# Altium PCB asserv1.PcbDoc
Units mil, origin at the board's own origin, x right, y up, seen from the top; angles counter-clockwise.
Board outline 2380 x 1995 mil, 2 copper layers (Top Layer, Bottom Layer); 68 components, 55 nets, 279 pads, 48 vias.
Unrouted connection lines stored in the file: 1.
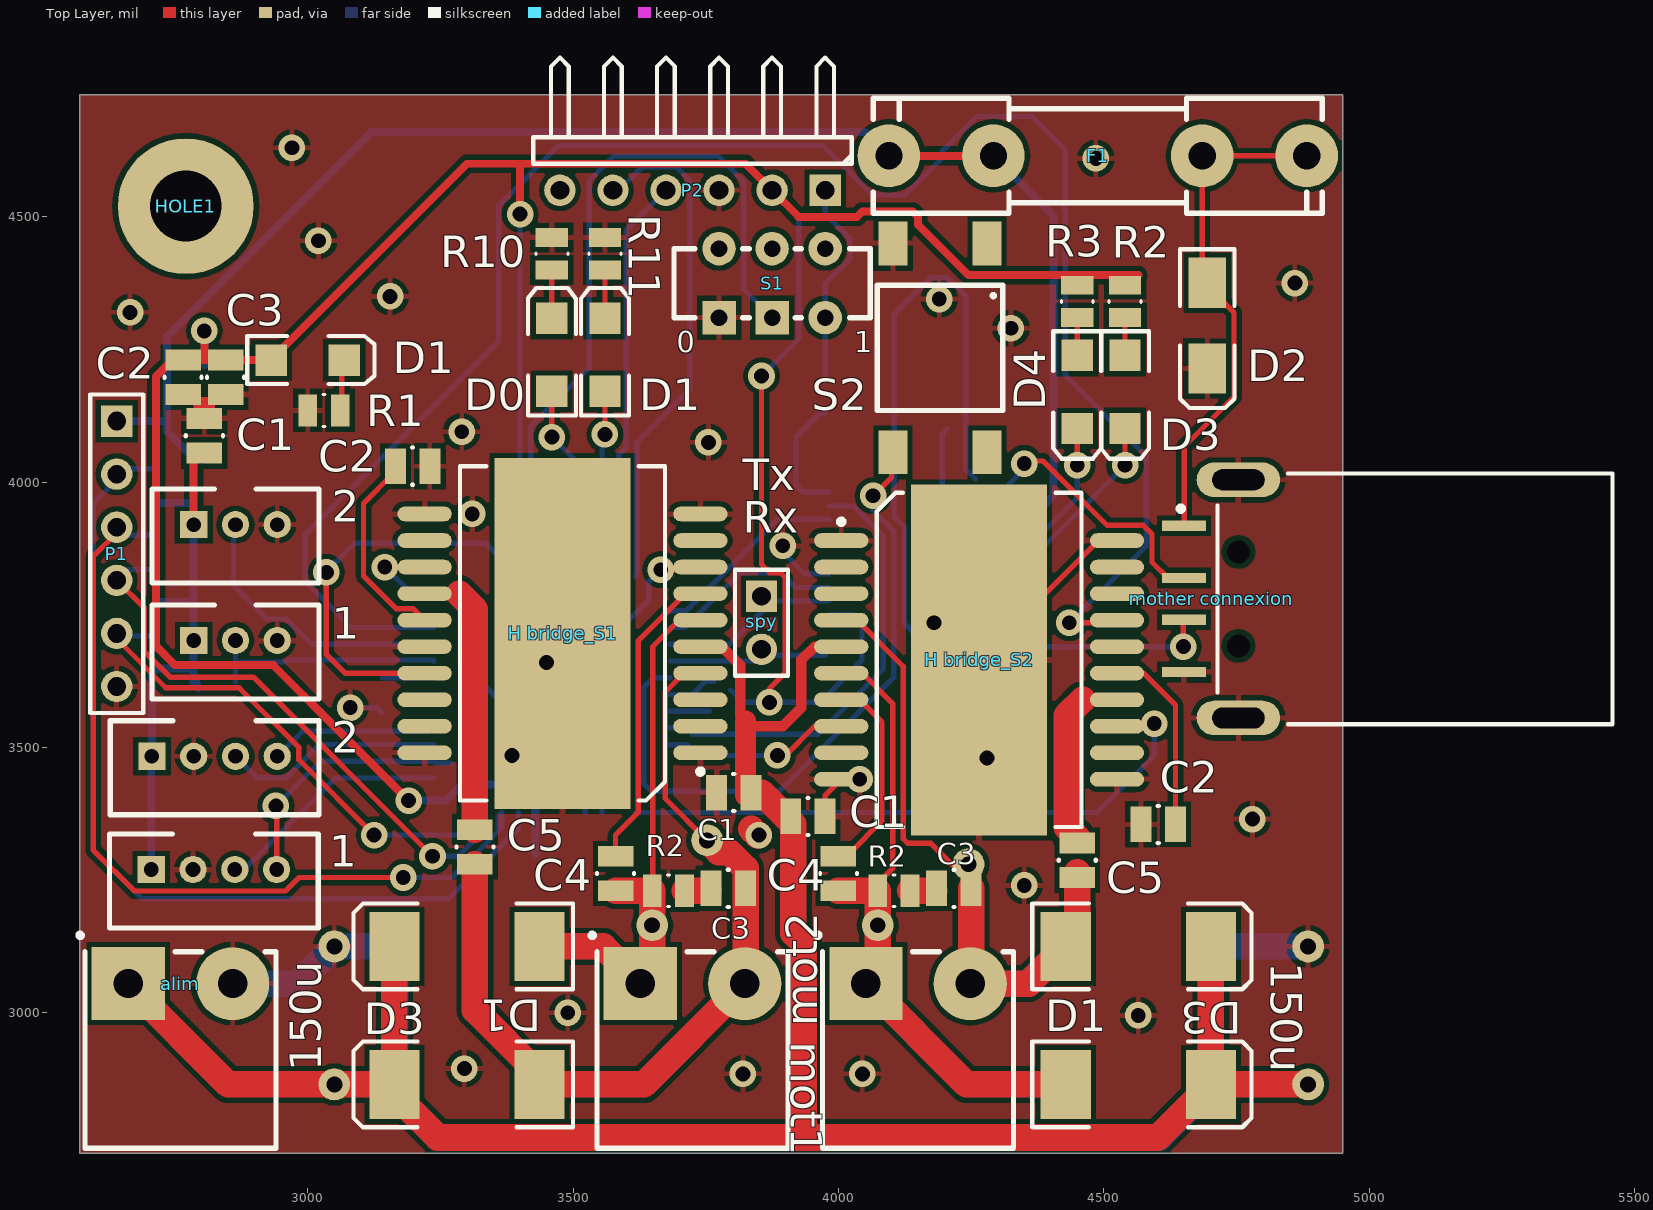
[diagram p0: Top Layer view]
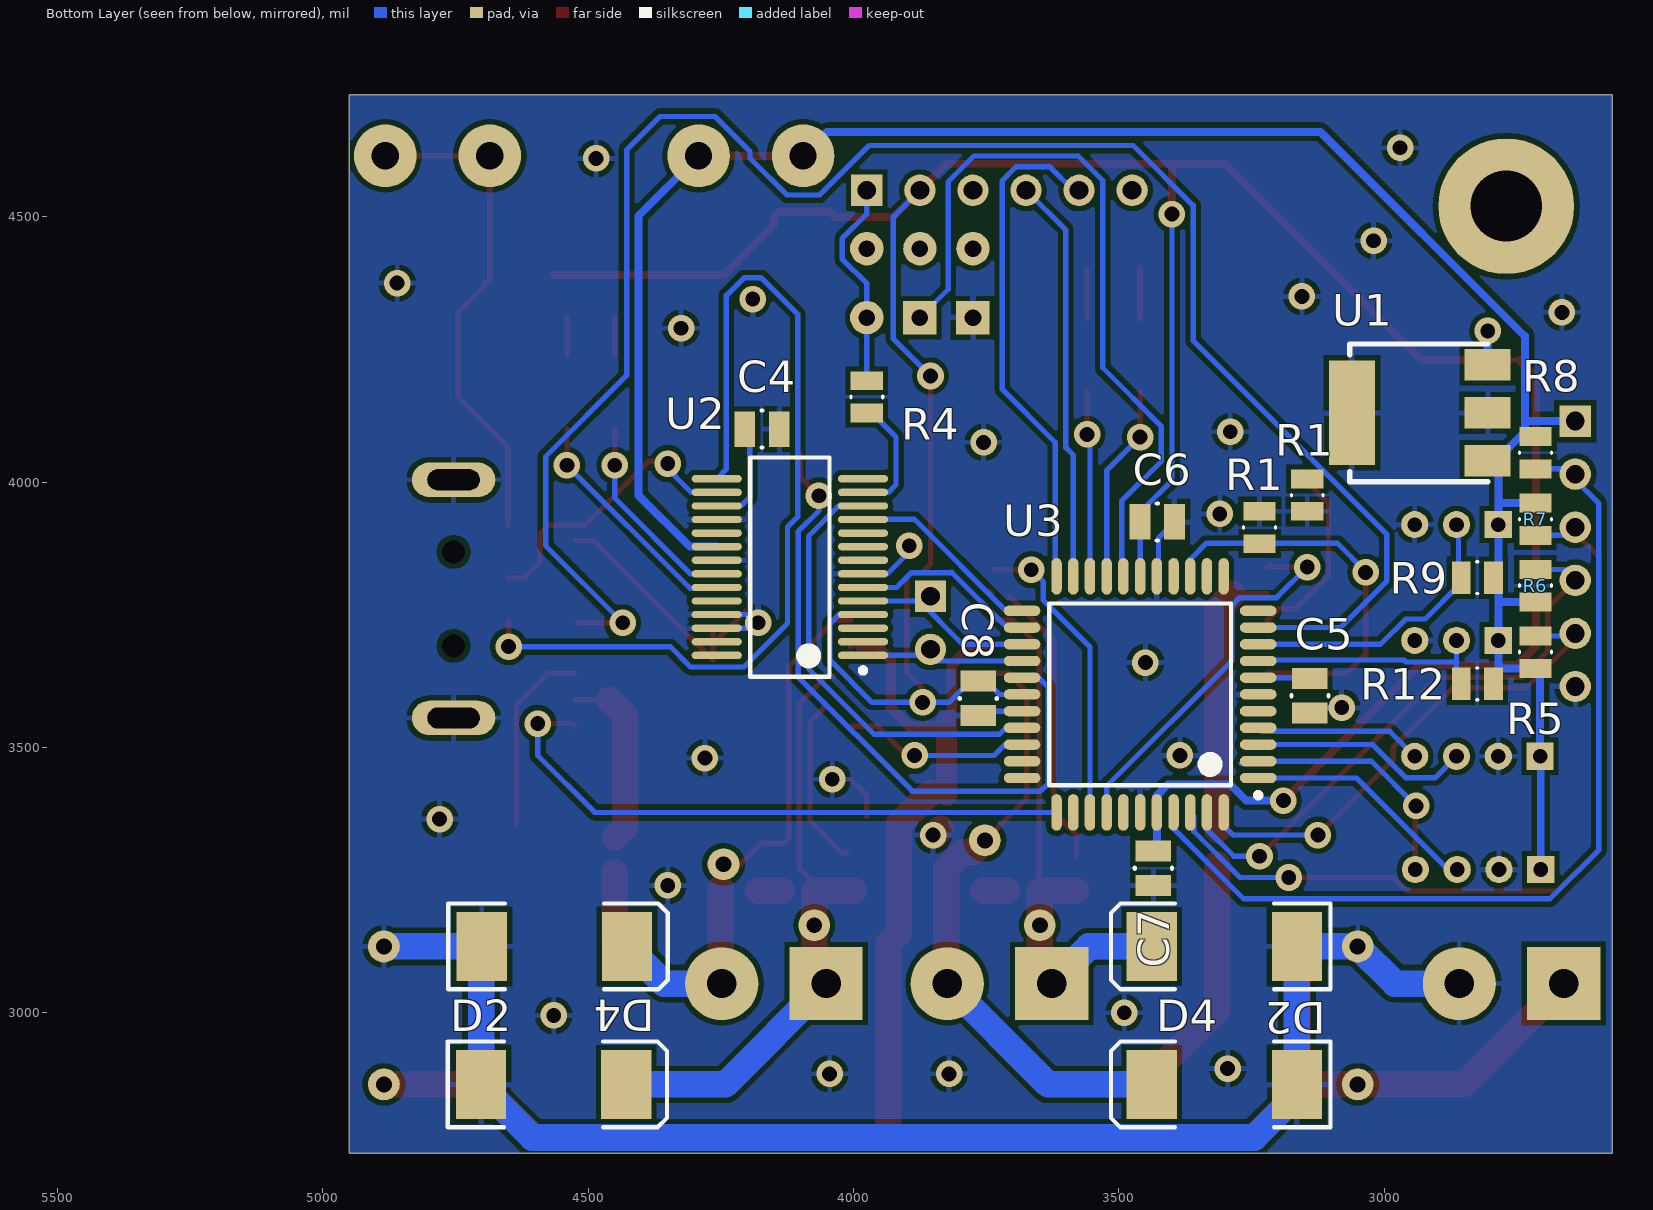
[diagram p1: Bottom Layer view, seen from below]

## Layer stack, top to bottom
Top Layer: signal copper 1.4
Dielectric: dielectric 12.6, FR-4, Dk 4.8
Bottom Layer: signal copper 1.4

## Board outline
2570,2735 2570,4730 4950,4730 4950,2735

## Design rules (kind name [scope] priority, off if disabled: settings)
Clearance [All] p1: gap=10
HoleSize [All] p1: absolutevalues=TRUE maxlimit=140 minlimit=1 maxpercent=80.000 minpercent=20.000
MinimumSolderMaskSliver [All] p1: minsoldermaskwidth=1
PolygonConnect [All] p1: connectstyle=Relief reliefconductorwidth=10 reliefentries=4 polygonreliefangle="90 Angle"
RoutingVias [All] p1: holewidth=28 width=50 viastyle="Through Hole" minholewidth=28 minwidth=50 maxholewidth=28 maxwidth=50
SilkToSilkClearance [All] p1: silktosilkclearance=1
SilkscreenOverComponentPads [All] p1: minsilkscreentomaskgap=1
SolderMaskExpansion [All] p1: expansion=4
Width [All] p1: maxlimit=100 minlimit=10 preferedwidth=10 minimp=50.000000 maximp=50.000000 favimp=50.000000
24 further rules are at their usual default settings.

## Classes and differential pairs
component class S2: C1 C2 C3 C4 C5 D1 D2 D3 D4 "H bridge_S2" mot2 R1 R2
channel class motors1-bridge: S1 S2
net class PWM[1..2]: PWM1 PWM2
net class DIRB[1..2]: DIRB1 DIRB2
net class DIRA[1..2]: DIRA1 DIRA2
component class S1: C1 C2 C3 C4 C5 D1 "H bridge_S1" mot1 R1 R2
component class asserv1: 1 2 alim C1 C2 C3 C4 C5 C6 C7 C8 D0 D1 D2 D3 D4 F1 HOLE1 "mother connexion" P1 P2 R1 R2 R3 R4 R5 R6 R7 R8 R9 R10 R11 R12 S1 spy U1 U2 U3

## Components (designator, comment, footprint, x,y, rotation, side; value= is the part's Value field where it differs from the comment)
1 "JST" B3B-PH-K-S 2785,3701.67 r0 top (schematic designator servo1)
1 "JST" B4B-PH-K-S 2705,3270 r0 top (schematic designator Encodeur1)
2 "JST" B3B-PH-K-S 2785,3920 r0 top (schematic designator servo2)
2 "JST" B4B-PH-K-S 2706.26,3483.33 r0 top (schematic designator Encodeur2)
alim "Bornier" "Bornier male coude 2 voies" 2760,3055 r0 top (schematic designator "alim motors")
C1 "" C0805C 2805,4055 r90 top
C1 "CAP" C0805C 3975,3370 r180 top
C1 "CAP" C0805C 3770,3415 r0 top
C2 "" C0805C 2765,4230 r270 top
C2 "CAP" C0805C 4570,3355 r0 top
C2 "CAP" C0805C 3230,4030 r180 top
C3 "" C0805C 2845,4230 r270 top
C3 "CAP" C0805C 4185,3234.43 r0 top
C3 "CAP" C0805C 3760,3234.43 r0 top
C4 "" C0805C 4140,4100 r0 bottom
C4 "CAP" C0805C 4000,3295 r270 top
C4 "CAP" C0805C 3580,3295 r270 top
C5 "" C0805C 3140,3630 r270 bottom
C5 "CAP" C0805C 4450,3320 r270 top
C5 "CAP" C0805C 3315,3345 r270 top
C6 "" C0805C 3460,3925 r180 bottom
C7 "" C0805C 3435,3305 r270 bottom
C8 "" C0805C 3765,3625 r270 bottom
D0 "LED" LED1206R 3460,4240 r90 top (schematic designator "led debug 0")
D1 "LED" LED1206R 3560,4240 r90 top (schematic designator "led debug 1")
D1 "LED2" LED1206G 3000,4230 r0 top
D1 "Diode" DSO-C2/X3.3 4565,2865 r0 top
D1 "Diode" DSO-C2/X3.3 3300,3125 r180 top
D2 "Diode" DSO-C2/X3.3 3301.22,3125 r0 bottom
D2 "Diode" DSO-C2/X3.3 4565,2865 r180 bottom
D2 "ZENER/5.6V" DSO-C2/X1.8 4695,4295 r270 top
D3 "Diode" DSO-C2/X3.3 3300,2865 r180 top
D3 "Diode" DSO-C2/X3.3 4565,3125 r0 top
D3 "LED2" LED1206Y 4540,4170 r270 top
D4 "Diode" DSO-C2/X3.3 3301.22,2865 r0 bottom
D4 "Diode" DSO-C2/X3.3 4563.78,3125 r180 bottom
D4 "LED2" LED1206Y 4450,4170 r270 top
F1 "200mA" "Fuse Holder 5x20mm" 4095,4615 r0 top
"H bridge_S1" "L6201P" PowerSO20_M 3480,3715 r180 top (schematic designator "H bridge")
"H bridge_S2" "L6201P" PowerSO20_M 4265,3665 r0 top (schematic designator "H bridge")
HOLE1 "Hole" SCREW 2770,4520 r90 top
mot1 "Bornier" "Bornier male coude 2 voies" 3725,3055 r0 top (schematic designator motors)
mot2 "Bornier" "Bornier male coude 2 voies" 4150,3055 r0 top (schematic designator motors)
"mother connexion" "USB male" "USB SM2.5 Male" 4860,3780 r0 top
P1 "Header 6" HDR1X6 2640,4115 r270 top
P2 "PICkit" HDR1X6H 3975,4550 r180 top
R1 "" C0805R 3000,4135 r0 top
R1 "RES" C0805R 3145,3945 r90 bottom
R1 "RES" C0805R 3235,3945 r270 bottom
R2 "" C0805R 4540,4310 r90 top
R2 "RES" C0805R 4135,3230 r180 top
R2 "RES" C0805R 3710,3230 r180 top
R3 "" C0805R 4450,4310 r90 top
R4 "" C0805R 3975,4130 r90 bottom
R5 "" C0805R 2715,3710 r270 bottom
R6 "" C0805R 2715,3835.34 r270 bottom
R7 "" C0805R 2715,3899.66 r90 bottom
R8 "" C0805R 2715,4025 r90 bottom
R9 "" C0805R 2855,3820 r180 bottom
R10 "" C0805R 3460,4400 r90 top
R11 "" C0805R 3560,4400 r90 top
R12 "" C0805R 2855,3620 r180 bottom
S1 "SW-DPDT/Reset" MCLSS22 3875,4310 r0 top
S2 "SPST-NO/RC2" SPST-NO 4280,4450 r180 top
spy "Header 2" HDR1X2 3855,3785 r270 top
U1 "LM2937IMP-3.3" SOT223 2805,4040 r90 bottom
U2 "FT232RL" SSOP-28_M 4120,3840 r0 bottom
U3 "DSPIC33FJ64MC804-I/PT" TQFP-PT44_N 3460,3600 r0 bottom

## Footprints (in the part's own frame and the unit in brackets; to place one, negate y for a bottom-side part, rotate by r counter-clockwise, add the part's x,y. Pads: shape width x height; smd on the part's side, far side on the other; paste and mask are expansions set on the pad)
B3B-PH-K-S [mm] "JST Header 3 pins Straight"
  rect 1.3x1.3 hole 0.7: 1(0,0)
  round 1.3 hole 0.7: 2(2,0) 3(4,0)
  silkscreen extent -2,-2.8 6,1.7, body extent -1.95,-2.8 5.95,1.7, height 6
B4B-PH-K-S [mm] "JST Header 4 pins Straight"
  rect 1.3x1.3 hole 0.7: 1(0,0)
  round 1.3 hole 0.7: 2(2,0) 3(4,0) 4(6,0)
  silkscreen extent -2,-2.8 8,1.7, body extent -1.95,-2.8 7.95,1.7, height 6
"Bornier male coude 2 voies" [mm] "Bornier male coude 2 voies 12A. Pas 5mm (model : CTB9350/2A) -- 3D FAUSSE"
  rect 3.5x3.5 hole 1.4: 1(-2.5,0)
  round 3.5 hole 1.4: 2(2.5,0)
  silkscreen extent -4.9,-7.87 4.57,2.41, body extent -4.2,-7.93 4.2,1.27, height 7.25
C0805C [mm]
  rect 1x1.7 smd: 1(0,0) 2(1.65,0)
  silkscreen extent 0.8,-0.89 0.85,0.89, body extent -0.21,-0.61 1.79,0.64, height 0.78
C0805R [mm]
  rect 0.9x1.55 smd: 1(0,0) 2(1.55,0)
  silkscreen extent 0.73,-0.76 0.81,0.76, body extent -0.24,-0.62 1.76,0.63, height 0.78
DSO-C2/X1.8 [mm] "Diode; DO-214-AC/SMA; 2 C-Bend Leads; Body 5 x 2.7 mm, inc. leads (LxW)"
  rect 2.4x1.8 smd: A(2.05,0) K(-2.05,0)
  silkscreen extent -3.65,-1.3 3.95,1.3, body extent -2.74,-1.4 2.74,1.4, height 2.28
DSO-C2/X3.3 [mm] "DO-214-AB/SMC; 2 C-Bend Leads; Body 7.9 x 5.9 mm, inc. leads (LxW)"
  rect 2.4x3.3 smd: A(-3.475,0) K(3.475,0)
  silkscreen extent -5.07,-2.05 5.43,2.05, body extent -4.06,-3.15 4.06,3.15, height 2.67
"Fuse Holder 5x20mm" [mm] "Schurter Fuse Holder 0751.0110"
  round 3 hole 1.3: 1(0,0) 1(5,0) 2(15,0) 2(20,0)
  silkscreen extent -0.75,-2.75 20.75,2.75, body extent -0.51,-3.1 20.58,3.1, height 9.86
HDR1X2 [mm] "Connector; Header; 2 Position"
  rect 1.5x1.5 hole 0.9: 1(0,0)
  round 1.5 hole 0.9: 2(2.54,0)
  silkscreen extent -1.27,-1.27 3.81,1.27, body extent -1.17,-1.25 3.91,1.25, height 8.2
HDR1X6 [mm] "Connector; Header; 6 Position"
  rect 1.5x1.5 hole 0.9: 1(0,0)
  round 1.5 hole 0.9: 2(2.54,0) 3(5.08,0) 4(7.62,0) 5(10.16,0) 6(12.7,0)
  silkscreen extent -1.27,-1.27 13.97,1.27
HDR1X6H [mm] "Connector; Header; 6 Position; Right Angle"
  rect 1.5x1.5 hole 0.9: 1(0,0)
  round 1.5 hole 0.9: 2(2.54,0) 3(5.08,0) 4(7.62,0) 5(10.16,0) 6(12.7,0)
  silkscreen extent -1.27,-6.35 13.97,-1.27, body extent -1.17,-5.85 13.87,1.25, height 5.42
LED1206G [mm] "SMT LED; 2 Flat Leads; 3.2X1.6X1.1"
  rect 1.5x1.5 smd: 1(-1.75,0) 2(1.75,0)
  silkscreen extent -2.9,-1.15 3.2,1.15, body extent -1.6,-0.8 1.6,0.8, height 1.11
LED1206R [mm] "SMT LED; 2 Flat Leads; 3.2X1.6X1.1"
  rect 1.5x1.5 smd: 1(-1.75,0) 2(1.75,0)
  silkscreen extent -2.9,-1.15 3.2,1.15, body extent -1.6,-0.8 1.6,0.8, height 1.11
LED1206Y [mm] "SMT LED; 2 Flat Leads; 3.2X1.6X1.1"
  rect 1.5x1.5 smd: 1(-1.75,0) 2(1.75,0)
  silkscreen extent -2.9,-1.15 3.2,1.15, body extent -1.6,-0.8 1.6,0.8, height 1.11
MCLSS22 [mm] "Slide Switch DPDT"
  rect 1.6x1.6 hole 0.8: 1(0,0) 2(-2.54,0)
  round 1.6 hole 0.8: 3(2.54,0) 4(0,3.3) 5(-2.54,3.3) 6(2.54,3.3)
  silkscreen extent -4.7,0 4.7,3.3, body extent -4.7,-2 4.7,3.3, height 3.5
PowerSO20_M [mm] "SOP, 20-Leads, Body 15.9x11mm, Pitch 1.27mm, IPC Low Density"
  oval 2.6x0.7 smd: 1(-6.6,5.715) 2(-6.6,4.445) 3(-6.6,3.175) 4(-6.6,1.905) 5(-6.6,0.635) 6(-6.6,-0.635) 7(-6.6,-1.905) 8(-6.6,-3.175) 9(-6.6,-4.445) 10(-6.6,-5.715) 11(6.6,-5.715) 12(6.6,-4.445) 13(6.6,-3.175) 14(6.6,-1.905) 15(6.6,-0.635) 16(6.6,0.635) 17(6.6,1.905) 18(6.6,3.175) 19(6.6,4.445) 20(6.6,5.715)
  rect 6.5x16.8 smd: 21(0,0)
  silkscreen extent -6.73,-8 4.9,8, body extent -7.2,-8 7.2,8, height 3.6
SCREW [mm] "Mounting Hole M3"
  round 6.5 hole 3.4: 1(0,0)
  body extent -2.89,-2.52 2.89,2.52, height 10
SOT223 [mm]
  rect 1.5x2.2 smd: 1(0,0) 2(2.3,0) 3(4.6,0)
  rect 5x2.2 smd: ""(2.3,6.5)
  silkscreen extent -1,0 5.6,6.6, body extent -0.95,-0.2 5.55,6.8, height 1.64
SPST-NO [mm] "Tactile Switch SPST-NO 6x6mm"
  rect 1.4x2.1 smd: 1(0,0) 2(4.5,0) 3(4.5,10) 4(0,10)
  silkscreen extent -0.75,2 5.25,8, body extent -0.75,0.93 5.25,9.08, height 5
SSOP-28_M [mm] "SOP, 28-Leads, Body 10.2x5.3mm, Pitch 0.65mm, IPC Low Density"
  oval 2.4x0.35 smd: 1(-3.5,4.225) 2(-3.5,3.575) 3(-3.5,2.925) 4(-3.5,2.275) 5(-3.5,1.625) 6(-3.5,0.975) 7(-3.5,0.325) 8(-3.5,-0.325) 9(-3.5,-0.975) 10(-3.5,-1.625) 11(-3.5,-2.275) 12(-3.5,-2.925) 13(-3.5,-3.575) 14(-3.5,-4.225) 15(3.5,-4.225) 16(3.5,-3.575) 17(3.5,-2.925) 18(3.5,-2.275) 19(3.5,-1.625) 20(3.5,-0.975) 21(3.5,-0.325) 22(3.5,0.325) 23(3.5,0.975) 24(3.5,1.625) 25(3.5,2.275) 26(3.5,2.925) 27(3.5,3.575) 28(3.5,4.225)
  silkscreen extent -3.62,-5.25 1.9,5.25, body extent -3.91,-5.1 3.91,5.1, height 1.98
TQFP-PT44_N [mm] "Thin QFP, 44-Leads, Body 10x10mm, Pitch 0.8mm, IPC Medium Density"
  oval 1.75x0.5 smd: 1(-5.65,4) 2(-5.65,3.2) 3(-5.65,2.4) 4(-5.65,1.6) 5(-5.65,0.8) 6(-5.65,0) 7(-5.65,-0.8) 8(-5.65,-1.6) 9(-5.65,-2.4) 10(-5.65,-3.2) 11(-5.65,-4) 23(5.65,-4) 24(5.65,-3.2) 25(5.65,-2.4) 26(5.65,-1.6) 27(5.65,-0.8) 28(5.65,0) 29(5.65,0.8) 30(5.65,1.6) 31(5.65,2.4) 32(5.65,3.2) 33(5.65,4)
  oval 0.5x1.75 smd: 12(-4,-5.65) 13(-3.2,-5.65) 14(-2.4,-5.65) 15(-1.6,-5.65) 16(-0.8,-5.65) 17(0,-5.65) 18(0.8,-5.65) 19(1.6,-5.65) 20(2.4,-5.65) 21(3.2,-5.65) 22(4,-5.65) 34(4,5.65) 35(3.2,5.65) 36(2.4,5.65) 37(1.6,5.65) 38(0.8,5.65) 39(0,5.65) 40(-0.8,5.65) 41(-1.6,5.65) 42(-2.4,5.65) 43(-3.2,5.65) 44(-4,5.65)
  silkscreen extent -5.77,-4.35 4.35,4.95, body extent -6,-6 6,6, height 1.05
"USB SM2.5 Male" [mm] "USB/SM2.5-4H4; Male USB Connector; USB1.1, Type A, SM; 4 Position; Right Angle"
  rect 2.1x0.5 smd: 1(-5.3,3.5) 2(-5.3,1) 3(-5.3,-1) 4(-5.3,-3.5)
  oval 4x1.65 hole 1 slot 2.5 at 0 deg: 5(-2.7,-5.7) 6(-2.7,5.7)
  round 0.8 hole 1.1 unplated: MH1(-2.7,-2.25) MH2(-2.7,2.25)
  silkscreen extent -5.58,-6 15.2,6, body extent -3.5,-6 14.83,6, height 4.5

## Part data
1 2: library part "Header 3", "Header, 3-Pin"
1 2: library part "Header 4", "Header, 4-Pin"
alim mot1 mot2: library part "Header 2", "Header, 2-Pin"
C1 C2 C3 C4 C5 C6 C7 C8: library part "Cap Semi", "Capacitor (Semiconductor SIM Model)"
C1 C1 C2 C2 C3 C3 C4 C4 C5 C5: "Capacitor"
D0 D1: library part LED2, "Typical RED, GREEN, YELLOW, AMBER GaAs LED"
D1 D3 D4: "Typical RED, GREEN, YELLOW, AMBER GaAs LED"
D1 D1 D2 D2 D3 D3 D4 D4: "Default Diode"
D2: library part ZENER, "ZENER"
F1: library part FUSE1
"H bridge_S1" "H bridge_S2": "DMOS Full Bridge Driver"
HOLE1: "Mounting Hole for screws"
"mother connexion": library part "USB Con", "USB Connector"
P1: "Header, 6-Pin"
P2: library part "Header ICSP", "Header, 6-Pin, Right Angle"
R1 R2 R3 R4 R5 R6 R7 R8 R9 R10 R11 R12: library part Res3, "Resistor"
R1 R1 R2 R2: "Resistor"
S1: library part SW-DPDT, "Double-Pole, Double-Throw Switch, ref MCLSS22"
S2: library part SPST-NO, "Tactile Switch 7.3mm, SMD"
spy: "Header, 2-Pin"
U1: "500 mA Low Dropout Regulator"
U2: "USB UART Asynchronous Serial Data Transfer Chip, SSOP-28, Tube"
U3: "High-Performance 16-bit Digital Signal Controller, 64 KB Flash, 16 KB RAM, 44-Pin TQFP, Industrial Temperature"

## Free pads (board coordinates)
  round 60 hole 30: 0(3050,3125) 1(3050,2865) 2(4885,2865) 4(4885,3125) 5(3648.98,3165) 7(4073.98,3165) 11(3752.57,3325) 12(4245,3280)

## Via types
v1: diameter 50, hole 28, Top Layer to Bottom Layer, 48 vias

## Nets (pads, with @x,y where several pads share a name; then routed paths per layer and width w, separated by ;. In a path a pad name is that pad's centre, name@x,y a point inside that pad or via, vN(x,y) a via of type N, cw(c..) or ccw(c..) an arc to the next point about the centre after c; other vN are vias at no path point)
+3V3: C2.1@2765,4230 C3.1@2845,4230 C6.1 C7.1 C8.1 D1.1@2931.1,4230 P2.2 R2.2@4540,4371.02 R3.2 U1.3 U2.4 U3.17 U3.28 U3.40 | length 6108.1
  Top Layer w10: C2.1@2745,4230 C2.1@2765,4230 ; v1@3855,3585 v1(3870,3585) 3870,3610.94 3899.53,3640.47 3899.53,3820.74 3890.74,3829.53 3870.74,3829.53 3855,3845.27 v1(3855,4200) v1@3855,4205.79 ; P2.2 P2.2@3880,4550
  Top Layer w15: C2.1@2745,4230 2714.04,4199.04 2714.04,3690.96 2750,3655 2935,3655 2992.5,3597.5 2992.5,3597.4 3017.4,3572.5 3017.5,3572.5 v1(3190,3400) ; C2.1@2765,4230 2805,4230 ; v1(2805,4285) 2805,4230 ; v1(3400,4505) 3400,4600 ; 4565,4390 4245,4390 4150,4485 4150,4500 4140,4510 4045,4510 4035,4500 3925,4500 P2.2 3825,4600 3400,4600 ; 2805,4230 2845,4230 2930,4230 3300,4600 3400,4600
  Bottom Layer w10: v1(3400,4505) 3400,4003.19 C6.1@3454.09,3949.09 ; U3.40 U3.40@3430,3379.05 ; U3.17 C6.1 C6.1@3460,3934.4 ; U3.28 3725,3600 3750,3625 C8.1 ; C8.1@3797.03,3607.97 3820,3585 v1(3870,3585) 3964.85,3585 4044.45,3664.59 4044.45,3733.91 4028.36,3750 3982.64,3750 U2.4 ; v1@3860.79,4205.79 3925,4270 3925,4500 P2.2
  Bottom Layer w15: U1.3 v1(2805,4285) ; v1(3190,3400) 3260,3400 3290,3430 3407.84,3430 3430,3407.84 U3.40@3430,3379.05 ; U3.40 3428.5,3301.5 C7.1@3430,3300 ; v1(3855,4200) 3855,4205.79 v1@3860.79,4205.79
+5V0: 1.1 2.1 C1.1@2805,4055 F1.1 P1.1 R5.2 R6.2 R7.2 R8.2 R9.2 R12.2 U1.1 U2.20 | length 4169.3
  Top Layer w15: 2.1@2785,3920 C1.1@2785,4055 ; F1.1@4095,4615 F1.1@4291.85,4615
  Bottom Layer w10: 2.1@2705,3482.07 2.1@2706.26,3483.33 ; R12.2@2783.98,3648.98 R12.2 R12.2@2793.98,3608.98 ; U1.1@2790,4040 U1.1
  Bottom Layer w15: P1.1 2735,4115 ; 1.1@2705,3265 2.1@2705,3482.07 ; 2.1@2706.26,3483.33 2706.26,3640.24 R5.2 R12.2@2783.98,3648.98 ; R6.2 2784.32,3774.32 ; R7.2 2784.32,3960.68 ; R12.2@2785,3620 2785,3701.67 2785,3920 U1.1@2785,4040 ; U1.1@2790,4040 2735,4095 2735,4115 ; F1.1@4095,4615 4050,4660 3119.9,4660 2735,4275.1 2735,4115 ; U2.20 4308.39,3878.39 4405,3975 4405,4501.85 F1.1@4291.85,4615
+30V: "H bridge_S1.5" "H bridge_S2.5" alim.1 C1.2@3834.96,3415 C1.2@3910.04,3370 D1.K D3.K pad.1 pad.2 | length 4210.2
  Top Layer w10: 3744.37,3694.53 3739.84,3690 3780,3690 ; C1.2@3829.96,3415 C1.2@3829.96,3430.04 ; 4005.12,3689.96 4005.16,3690
  Top Layer w15: 3955,3690 3990,3690
  Top Layer w20: D3.K@3163.19,2846.81 D3.K@3163.19,2865 ; 3780,3690 3815,3655 3815,3560 ; 3835,3540 3895,3540 3930,3575 3930,3665 3955,3690
  Top Layer w40: C1.2@3825,3410 3825,3550
  Top Layer w50: alim.1@2660.79,3054.21 2850,2865 3163.19,2865 D1.K@3163.19,3125 ; D3.K@3163.19,2846.81 3245,2765 3935,2765 3935,3130 3915,3150 3915,3355 3855,3415 ; 3940,2765 4601.81,2765 D1.K@4701.81,2865 ; D3.K@4701.81,3125 D1.K@4701.81,2865 ; pad.2 D1.K@4701.81,2865
A1: 1.3@2862.48,3270 U3.1 | length 448.6
  Bottom Layer w10: 1.3@2862.48,3265 2875,3265 3052.52,3442.52 U3.1
A2: 2.3@2863.74,3483.33 U3.3 | length 416.6
  Bottom Layer w10: 2.3@2863.74,3483.33 2904.33,3442.74 2959.29,3442.74 3022.06,3505.51 U3.3
B1: 1.4 U3.2 | length 491.3
  Top Layer w10: 1.4@2941.22,3265 v1@2941.22,3390
  Bottom Layer w10: v1(2940,3390) 3024.02,3474.02 U3.2 3241.57,3470 U3.2@3269.82,3470
B2: 2.4 U3.4 | length 317.3
  Bottom Layer w10: 2.4 2989.5,3530.35 3230.91,3530.35 U3.4
CLK12: U2.12 U3.30 | length 834.2
  Bottom Layer w10: U3.30 3712.99,3537.01 3725,3525 3961.42,3525 4084.45,3648.03 4084.45,3898.63 4028.08,3955 3982.36,3955 U2.12
D+: "mother connexion.3" U2.15 | length 1744.9
  Top Layer w10: v1(4650,3690) 4650,3739.29
  Bottom Layer w10: U2.15 4239.65,4024.49 4239.65,4351.92 4206.57,4385 4173.43,4385 4105.31,4316.88 4105.31,3934.34 4124.45,3915.2 4124.45,3733.98 4206.66,3651.77 4307.22,3651.77 4345.44,3690 v1(4650,3690)
D-: "mother connexion.2" U2.16 | length 560.5
  Top Layer w10: v1(4350,4035) 4355,4040 4385.15,4040 4506.37,3918.78 4574.16,3918.78 4591.02,3901.92 4591.02,3848.98 4620.63,3819.37 4651.34,3819.37
  Bottom Layer w10: U2.16 4305.75,3980.75 4360,4035 v1(4350,4035)
"DATA SERVO1": 1.2@2863.74,3701.67 R12.1 U3.8 | length 452.9
  Bottom Layer w10: R12.1@2863.74,3623.74 1.2@2863.74,3701.67 ; 2864.82,3661.08 2959.29,3661.08 2962.9,3664.69 3235.87,3664.69 U3.8
"DATA SERVO2": 2.2@2863.74,3920 R9.1 U3.9 | length 534.6
  Bottom Layer w10: 2.2@2860,3916.26 2860,3820 2860,3805 2922.74,3742.26 2959.29,3742.26 3007.06,3694.49 U3.9
DIRA1: "H bridge_S1.8" U3.36 | length 573.1
  Top Layer w10: v1(3665,3835) 3734.84,3835
  Bottom Layer w10: U3.36 3554.49,3689.27 3642.32,3777.1 3642.32,3812.32 v1(3665,3835)
DIRA2: "H bridge_S2.8" U3.31 | length 354
  Top Layer w10: v1(3885,3485) 3900,3485 3955,3540 4005.16,3540
  Bottom Layer w10: U3.31 3682.6,3505.35 3714.65,3505.35 3735,3485 v1(3885,3485)
DIRB1: "H bridge_S1.13" U3.37 | length 742.1
  Top Layer w10: v1(3145,3840) 3220.16,3840 3215.16,3845
  Bottom Layer w10: v1(3145,3840) 3202.68,3782.32 3272.46,3782.32 3287.01,3767.77 3287.01,3662.99 3522.99,3427.01 U3.37
DIRB2: "H bridge_S2.13" U3.34 | length 1154.3
  Top Layer w10: 4524.84,3540 4529.84,3545 v1(4595,3545)
  Bottom Layer w10: U3.34 4487.56,3377.56 4595,3485 v1(4595,3545)
FLUSH: U2.6 U3.24 | length 354.6
  Bottom Layer w10: U3.24 3710.98,3725.98 3815,3830 3815.47,3829.53 3890.74,3829.53 3913.39,3806.88 3918.65,3801.61 U2.6
GND: 1.2@2783.74,3270 1.3@2942.48,3701.67 2.2@2785,3483.33 2.3@2942.48,3920 "H bridge_S1.1" "H bridge_S1.10" "H bridge_S1.11" "H bridge_S1.16" "H bridge_S1.20" "H bridge_S1.21" "H bridge_S2.1" "H bridge_S2.10" "H bridge_S2.11" "H bridge_S2.16" "H bridge_S2.20" "H bridge_S2.21" "mother connexion.4" "mother connexion.5" "mother connexion.6" alim.2 C1.1@3770,3415 C1.1@3975,3370 C1.2@2805,4119.96 C2.1@3230,4030 C2.1@4570,3355 C2.2@2765,4165.04 C3.2@2845,4165.04 C4.1@4140,4100 C5.2@3140,3565.04 C6.2 C7.2 C8.2 D2.A D4.A P1.6 P2.3 pad.0 pad.4 R1.1 R10.2 R11.2 S1.2 S2.2 U1. U1.2 U2.7 U2.18 U2.21 U2.25 U2.26 U3.6 U3.16 U3.29 U3.39 | length 3853.8
  Top Layer w10: C1.1@3975,3370 3975,3409.84 4005.16,3440 ; v1@4195,3735 4195,3765 4265,3695 ; 4265,3725 4265,3665 4490,3890 4524.84,3890
  Top Layer w50: v1@3835.39,3346.54 3846.93,3335 v1(3850,3335)
  Bottom Layer w10: v1(3080,3575) 3130.04,3575 C5.2@3140,3565.04 ; C6.2 3425.31,3894.72 3425.31,3825.63 U3.16 ; U3.29 C8.2@3756.54,3568.5 ; v1(3895,3880) 3895,3868.69 3936.48,3827.2 U2.7 ; U2.26 4190.16,3724.84 v1(4180,3735) 4195.43,3750.43 U2.25 ; D4.A@4700.59,3125 D4.A@4701.81,3123.78
  Bottom Layer w50: alim.2 2980,3055 pad.0 3164.4,3125 3164.41,2865 3164.41,2845.59 3244.97,2765.03 4605.03,2765.03 4701.81,2861.81 4701.81,2865 D4.A@4701.81,3123.78 ; D4.A@4700.59,3125 pad.4
  other v1: 3820,2885 4045,2885 3295,2895 4565,2995 3490,3000 4350,3240 4780,3365 4040,3440 4280,3480 3385,3485 3450,3660 3310,3940 3755,4075 3290,4095 4325,4290 2665,4320 4190,4345 3155,4350 4860,4375 3020,4455 4485,4610 2970,4630
GPIO: R4.1 U2.13 | length 231.8
  Bottom Layer w10: R4.1 3965,4130 3919.96,4084.96 3919.96,3995.04 3934.25,3980.75 U2.13
MCLR: P2.1 R4.2 S1.3 | length 397.5
  Bottom Layer w10: R4.2 S1.3 3975,4374.17 4021.5,4420.66 4021.5,4459.18 3975,4505.68 P2.1
NetC2_S1_2: "H bridge_S1.15" C2.2@3165.04,4030 | length 364.1
  Top Layer w10: C2.2@3160.04,4015 3105,3959.96 3105,3823.43 3167.21,3761.22 3198.94,3761.22 3220.16,3740
NetC2_S2_2: "H bridge_S2.15" C2.2@4634.96,3355 | length 360
  Top Layer w10: 4524.88,3640.04 4524.84,3640 4575,3640 4635,3580 C2.2@4635,3355.04
NetC4_2: C4.2@4204.96,4100 U2.17 | length 154.2
  Bottom Layer w10: C4.2@4204.96,4100 4195.55,4090.59 4195.55,3971.68 U2.17@4211.12,3956.12
NetC4_S1_1: "H bridge_S1.7" C4.1@3580,3295 | length 547.9
  Top Layer w10: C4.1@3580,3295 3580,3335.13 3622.95,3378.08 3622.95,3701.21 3705.87,3784.13 ; 3739.84,3790 3744.57,3794.72
NetC4_S2_1: "H bridge_S2.7" C4.1@4000,3295 | length 323.6
  Top Layer w10: C4.1@4013.52,3301.48 4021.48,3301.48 4082.05,3362.05 4082.05,3547.95 4050.87,3579.13
NetC5_1: C5.1@3140,3630 U3.7 | length 96.1
  Bottom Layer w10: C5.1@3141.5,3631.5 U3.7
NetC5_S1_1: "H bridge_S1.14" C5.1@3315,3345 | length 522.3
  Top Layer w10: 3220.16,3790 3285,3790
  Top Layer w50: 3285,3790 3315,3760 C5.1@3315,3345
NetC5_S2_1: "H bridge_S2.14" C5.1@4450,3320 | length 345.6
  Top Layer w10: 4460,3590 4524.84,3590
  Top Layer w50: C5.1@4450,3330 4430,3350 4430,3560 4460,3590
NetD1_2: D1.2@3068.9,4230 R1.2@3061.02,4135 | length 92.1
  Top Layer w10: R1.2@3063.9,4137.87 D1.2@3063.9,4230
NetD2_K: "mother connexion.1" D2.K@4695,4375.71 F1.2 | length 950.2
  Top Layer w10: 4651.34,3917.8 4651.34,4066.74 4745.43,4160.83 4745.43,4319.57 4695,4370 D2.K@4695,4375.71 ; D2.K@4685.55,4379.45 4685.55,4615 F1.2@4882.4,4615
NetD3_1: D3.1 R2.1@4540,4310 | length 71.1
  Top Layer w10: D3.1 R2.1@4540,4310
NetD4_1: D4.1 R3.1 | length 71.1
  Top Layer w10: D4.1 R3.1
"Netled debug 0_1": D0.1 U3.19 | length 384.8
  Top Layer w10: v1@3460,4080 D0.1
  Bottom Layer w10: v1@3460,4080 v1(3460,4085) 3522.99,4022.01 U3.19
"Netled debug 0_2": D0.2 R10.1 | length 96.1
  Top Layer w10: D0.2 R10.1@3460,4405
"Netled debug 1_1": D1.1@3560,4171.1 U3.20 | length 370.9
  Top Layer w10: v1(3560,4090) D1.1@3560,4171.1
  Bottom Layer w10: U3.20 3554.49,4094.49 3560,4100 v1(3560,4090)
"Netled debug 1_2": D1.2@3560,4308.9 R11.1 | length 91.1
  Top Layer w10: D1.2@3560,4308.9 R11.1
NetP1_2: P1.2 R8.1 U3.41 | length 1710.3
  Bottom Layer w10: P1.2@2635,4015 P1.2 ; P1.2@2640,4004.06 2595.47,3959.53 2595.47,3307.13 2687.61,3215 3265,3215 3397.01,3347.01 U3.41 ; P1.2@2650,4025 R8.1
NetP1_3: P1.3 R7.1 U3.42 | length 1595.2
  Top Layer w10: P1.3 2640,3904.06 2595.47,3859.53 2595.47,3307.13 2673.2,3229.41 2958.03,3229.41 2983.62,3255 v1(3180,3255)
  Bottom Layer w10: P1.3@2655.34,3899.66 R7.1 ; v1(3180,3255) 3271.72,3255 3358.86,3342.14 3358.86,3370.91 U3.42 U3.42@3365.51,3348.8
NetP1_4: P1.4 R6.1 U3.43 | length 1084.9
  Top Layer w10: P1.4 2691.54,3763.46 2691.54,3681.64 2740.68,3632.5 2897.5,3632.5 v1(3235,3295) v1@3235,3275
  Bottom Layer w10: P1.4@2660.34,3835.34 R6.1 ; v1(3235,3295) 3283.43,3295 3334.02,3345.58 U3.43
NetP1_5: P1.5 R5.1 U3.44 | length 941.7
  Top Layer w10: P1.5 2640,3704.9 2732.4,3612.5 2870.72,3612.5 2983.07,3500.15 2983.07,3476.93 v1(3125,3335)
  Bottom Layer w10: P1.5@2645,3710 R5.1 ; v1(3125,3335) 3285,3335 3302.52,3352.52 U3.44
NetS1_1: S1.1 U3.18 | length 1432.7
  Bottom Layer w10: U3.18 3494.69,3825.63 3494.69,3964.68 3420,4039.36 3420,4105 3530.47,4215.47 3530.47,4568.44 3576.56,4614.53 3773.44,4614.53 3821.5,4566.48 3821.5,4363.5 S1.1
NetS2_3: S2.3 U3.27 | length 1259.9
  Top Layer w10: v1(4065.32,3974.34) 4065.66,3974.34 4100,4008.67 4100,4053.46 S2.3
  Bottom Layer w10: U3.27 3651.5,3631.5 3632.99,3612.99 3632.99,3432.23 3647.54,3417.68 3889.25,3417.68 4104.45,3632.88 4104.45,3906.92 4065.32,3946.05 v1(4065.32,3974.34)
OUT1_S1: "H bridge_S1.6" C4.2@3580,3230.04 D1.A@3436.81,3125 D2.K@3438.03,3125 mot1.1 pad.5 R2.2@3648.98,3230 | length 1260.5
  Top Layer w10: R2.2@3648.94,3230.04 3648.98,3230 3650,3231.02 3650,3690 3700,3740 3739.84,3740
  Top Layer w50: D1.A@3436.81,3125 3556.57,3125 mot1.1 3648.98,3077.4 R2.2@3648.98,3230 ; C4.2@3580,3230.04 R2.2@3648.94,3230.04
  Bottom Layer w50: D2.K@3438.03,3125 3556.58,3125 mot1.1
OUT1_S2: "H bridge_S2.6" C4.2@4000,3230.04 D1.A@4428.19,2865 D2.K@4428.19,2865 mot2.1 pad.7 R2.2@4073.98,3230 | length 1617.5
  Top Layer w10: 4039.13,3634.13 4050.87,3634.13 4102.05,3582.95 4102.05,3272.05 4073.98,3243.98 R2.2@4073.98,3230
  Top Layer w50: C4.2@4000.04,3230 4073.98,3230 4073.98,3077.4 mot2.1 4241.57,2865 D1.A@4428.19,2865
  Bottom Layer w50: mot2.1 4241.57,2865 D2.K@4428.19,2865
OUT2_S1: "H bridge_S1.4" C3.2@3824.96,3234.43 C5.2@3315,3280.04 D3.A@3436.81,2865 D4.K@3438.03,2865 mot1.2 pad.11 | length 2100.1
  Top Layer w10: D3.A@3436.81,2865 D3.A@3436.81,2883.19 ; 3739.84,3640 3708.98,3640 3673.66,3604.69 3673.66,3403.91 pad.11 ; mot1.2 mot1.2@3824.96,3056.54
  Top Layer w50: C5.2@3315,3280.04 3315,3005 D3.A@3436.81,2883.19 ; D3.A@3436.81,2865 3633.43,2865 mot1.2 ; pad.11 3774.69,3302.89 3794.18,3302.89 3824.96,3272.11 3824.96,3234.43 mot1.2@3824.96,3056.54
  Bottom Layer w50: D4.K@3438.03,2865 3633.42,2865 mot1.2
OUT2_S2: "H bridge_S2.4" C3.2@4249.96,3234.43 C5.2@4450,3255.04 D3.A@4428.19,3125 D4.K@4426.97,3125 mot2.2 pad.12 | length 1395.5
  Top Layer w10: 4005.16,3740 4035,3740 4122.05,3652.95 4122.05,3328.08 4130.83,3319.29 4174.5,3319.29 4249.96,3243.83 C3.2@4249.96,3234.43 ; mot2.2 mot2.2@4249.96,3056.54 ; D3.A@4428.19,3125 D3.A@4450,3146.81
  Top Layer w50: mot2.2 4358.19,3055 D3.A@4428.19,3125 ; mot2.2@4249.96,3056.54 C3.2@4249.96,3234.43 ; D3.A@4450,3146.81 C5.2@4450,3265.04
  Bottom Layer w50: mot2.2 4356.97,3055 D4.K@4426.97,3125
PGEC: P2.5 U3.22 | length 962
  Bottom Layer w10: P2.5 3585.94,4550 3630.47,4594.53 3693.44,4594.53 3719.53,4568.44 3719.53,4174.67 3620,4075.15 3620,3824.96 U3.22
PGED: P2.4 U3.21 | length 764.4
  Bottom Layer w10: U3.21 3585.98,4050.98 3600,4065 3600,4475 P2.4
PWM1: "H bridge_S1.17" R1.2@3235,3883.98 U3.14 | length 762
  Top Layer w10: v1(3035,3830) 3035,3675 3070,3640 ; 3080,3640 3070,3640 ; 3220.16,3640 3070,3640
  Bottom Layer w10: v1@3035,3831.57 3088.43,3885 3335,3885 3365.51,3854.49 U3.14
PWM2: "H bridge_S2.17" R1.2@3145,4006.02 U3.10 | length 3485.2
  Top Layer w10: v1(4435,3735) 4519.84,3735
  Bottom Layer w10: U3.10 3082.45,3725.98 2995,3813.43 2995,3901.7 3360,4266.7 3360,4521.57 3472.96,4634.53 3970.74,4634.53 4064.33,4540.94 4125.67,4540.94 4195,4610.27 4195,4622.88 4261.18,4689.06 4364.62,4689.06 4427.5,4626.17 4427.5,4200.78 4580,4048.28 4580,3880 v1(4435,3735)
RTS: U2.11 U3.23 | length 371.4
  Bottom Layer w10: U3.23 3712.48,3757.48 3885,3930 3981.77,3930 U2.11
RX: spy.2 U2.1 U3.26 | length 297
  Bottom Layer w10: U3.26 3852.01,3662.99 3862.68,3673.66 U2.1@3975,3673.66
RXLED: D3.2 U2.23 | length 448.2
  Top Layer w10: v1(4540,4031.72) D3.2
  Bottom Layer w10: U2.23 4259.41,3800 4308.28,3800 v1(4540,4031.72)
TX: spy.1 U2.5 U3.25 | length 333.5
  Bottom Layer w10: U3.25 3794.49,3694.49 3876.02,3776.02 U2.5
TXLED: D4.2 U2.22 | length 382.5
  Top Layer w10: v1(4450,4031.72) D4.2
  Bottom Layer w10: U2.22 4307.2,3827.2 4450,3970 v1(4450,4031.72)
pads on no net: "H bridge_S1.2" "H bridge_S1.3" "H bridge_S1.9" "H bridge_S1.12" "H bridge_S1.18" "H bridge_S1.19" "H bridge_S2.2" "H bridge_S2.3" "H bridge_S2.9" "H bridge_S2.12" "H bridge_S2.18" "H bridge_S2.19" "mother connexion.MH1" "mother connexion.MH2" C3.1@3760,3234.43 C3.1@4185,3234.43 HOLE1.1 P2.6 R2.1@3710,3230 R2.1@4135,3230 S1.4 S1.5 S1.6 S2.1 S2.4 U2.2 U2.3 U2.8 U2.9 U2.10 U2.14 U2.19 U2.24 U2.27 U2.28 U3.5 U3.11 U3.12 U3.13 U3.15 U3.32 U3.33 U3.35 U3.38
copper on no net: | length 91.1
  Top Layer w50: 3710,3230 3755.57,3230 ; 4135,3230 4180.57,3230

## Polygon pours and split planes (outlines as drawn)
GND on Bottom Layer "Bottom Layer-No Net" (solid, pour order 2): 2570,4730 2570,2735 4950,2735 4950,4730 2570,4730
GND on Top Layer "Bottom Layer-No Net" (solid, pour order 4): 4950,2735 4950,4730 2570,4730 2570,2735 4950,2735

## Other copper
Top Layer:
  rectangle net GND: 2785,4130 2825,4160

## Silkscreen, mask and mechanical layers (free items; w line width, h text height)
Top Overlay:
  text "Tx" at 3820,3985 h60
  text "Rx" at 3820,3905 h60
  text "150u" at 4815,3095 h60 r270
  text "150u" at 3025,2890 h60 r90
Bottom Solder:
  rectangle: 4185,3720 4245,3755
Mechanical 1:
  the board outline again, w10

## Dimensions
2570,4730 to 4950,4730 on Mechanical 1
2570,2735 to 2570,4730 on Mechanical 1

## Text inside footprints (layer, text, board x,y; h text height)
"mother connexion": Mechanical 1 "PCB Edge" at 4878.6,3576.35 h9.84 r90
S1: Top Overlay "1" at 4030,4245 h39.37; Top Overlay "0" at 3695,4245 h39.37